# Altium PCB PCB2.PcbDoc
Units mm, origin at the board's own origin, x right, y up, seen from the top; angles counter-clockwise.
Board outline 105.41 x 72.39 mm, 2 copper layers (Top Layer, Bottom Layer), stack 1.571 mm thick; 9 components, 50 nets, 179 pads, 12 vias.
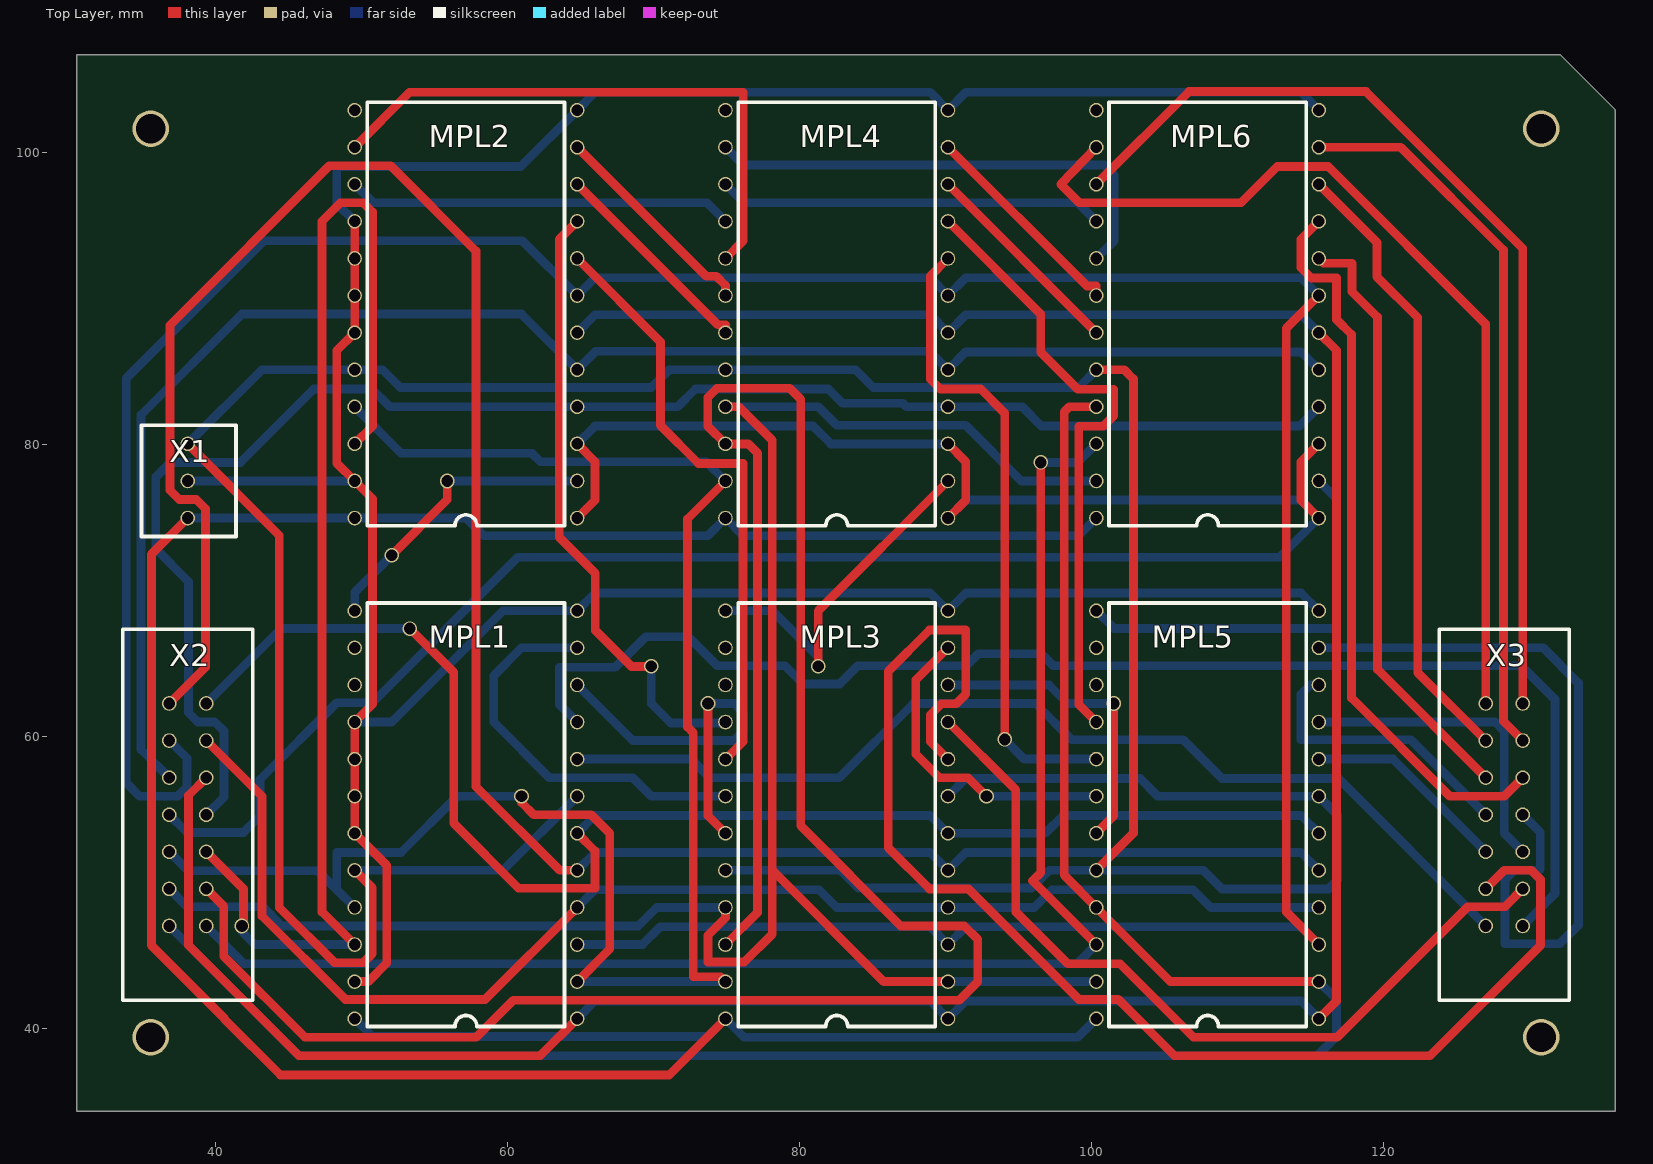
[diagram p0: Top Layer view]
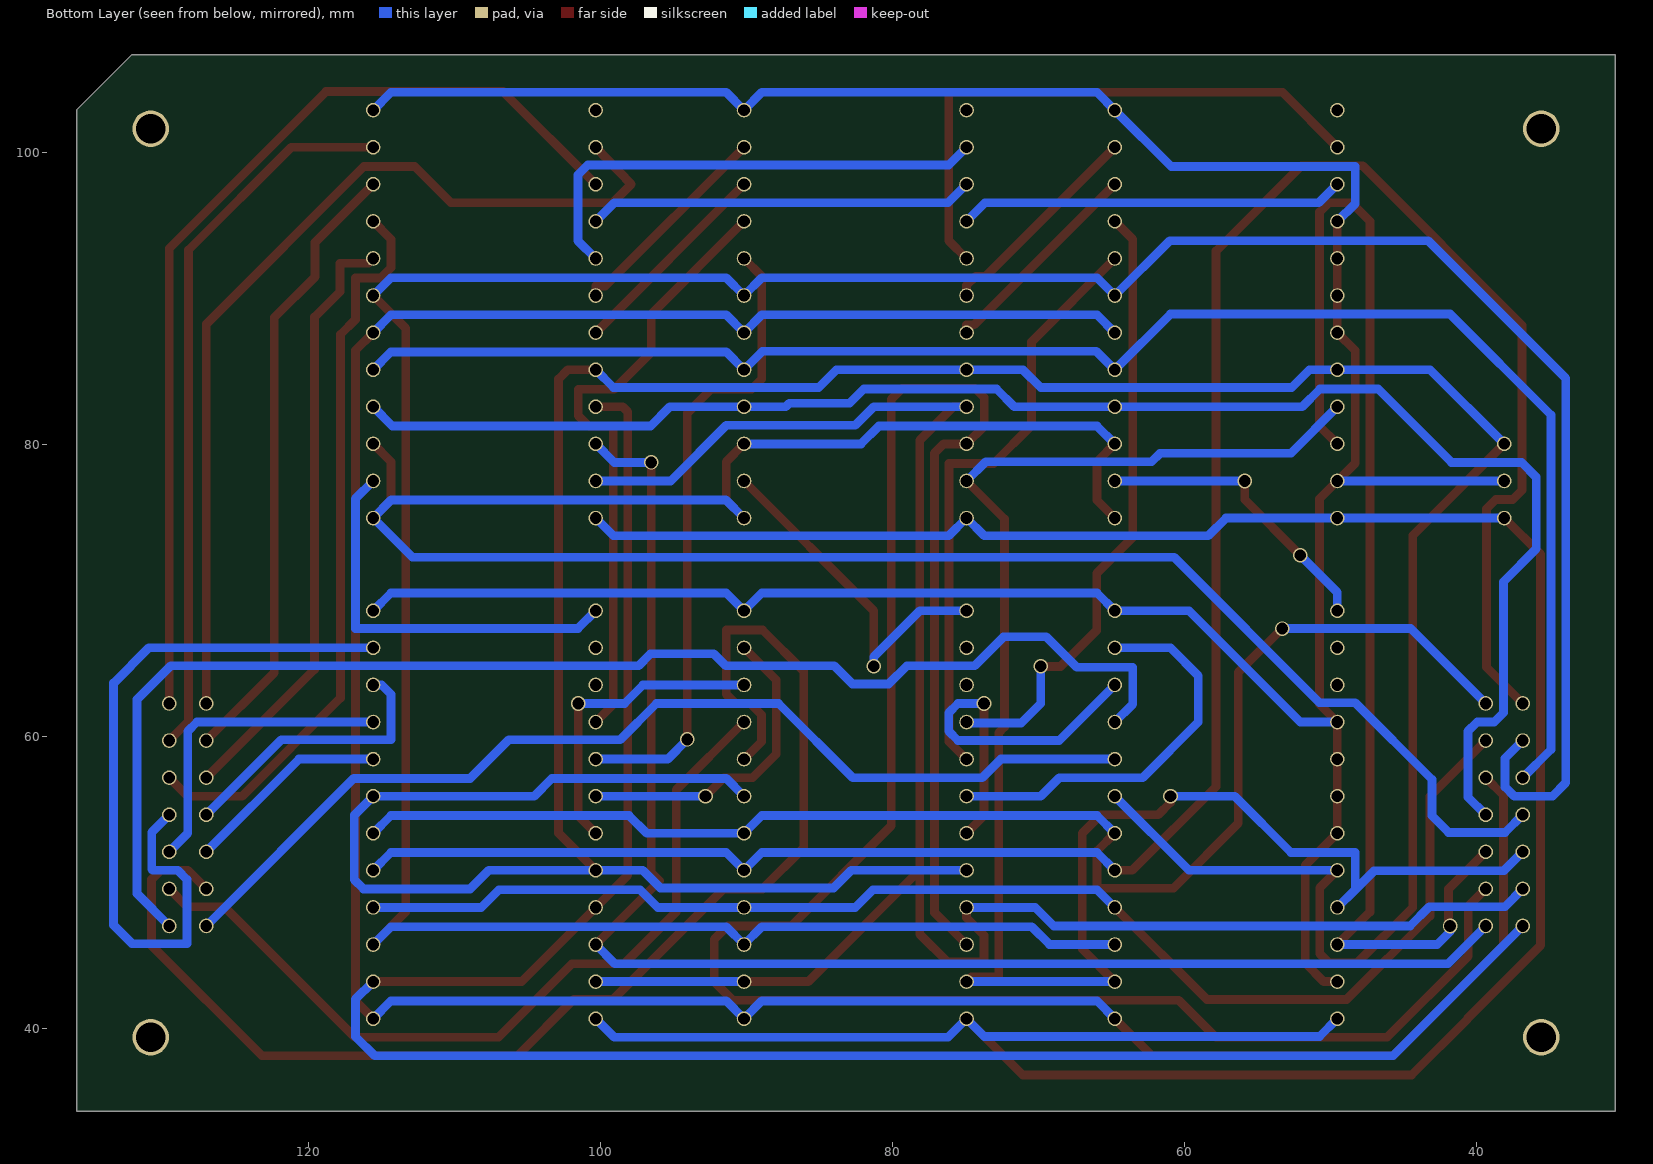
[diagram p1: Bottom Layer view, seen from below]
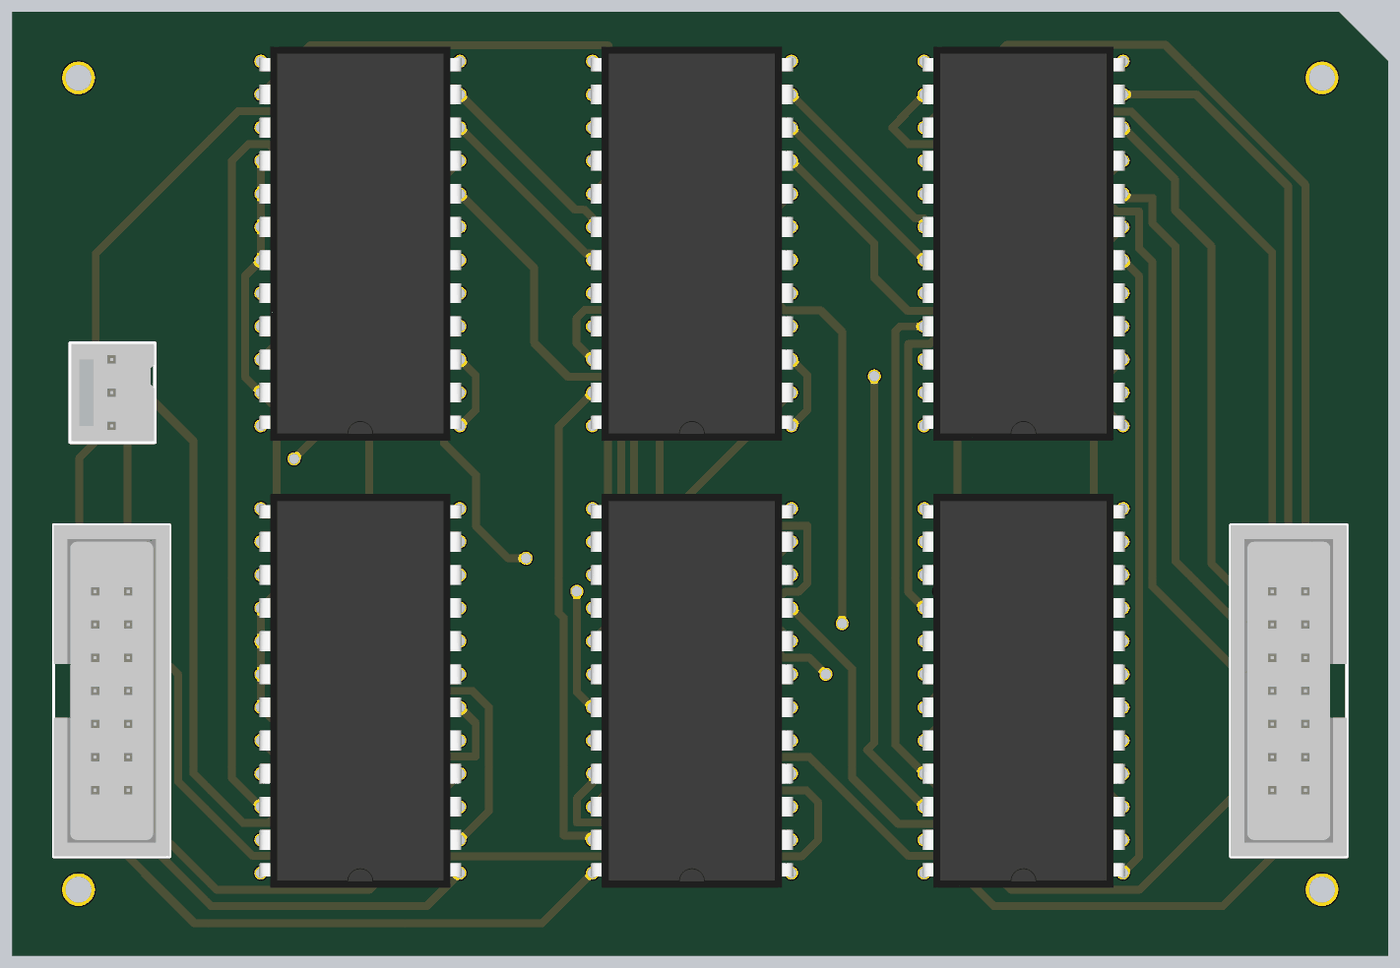
[diagram p2: 3D render of the assembled board from above, using the file's embedded part models]

## Layer stack, top to bottom
Top Solder: solder mask 0.0102, Solder Resist, Dk 3.5
Top Layer: signal copper 0.0356
Dielectric 1: dielectric 1.5, FR-4, Dk 4.8
Bottom Layer: signal copper 0.0356
Bottom Solder: solder mask 0.0102, Solder Resist, Dk 3.5

## Board outline
30.48,34.29 135.89,34.29 135.89,102.87 132.08,106.68 30.48,106.68

## Design rules (kind name [scope] priority, off if disabled: settings)
Clearance [All] p1: gap=0.4 ignorepadtopadclearanceinfootprint=FALSE
PolygonConnect [All] p1: connectstyle=Relief reliefconductorwidth=0.254 reliefentries=4 polygonreliefangle="90 Angle" airgapwidth=0.254
RoutingVias [All] p1: holewidth=0.711 width=1.27 viastyle="Through Hole" minholewidth=0.711 minwidth=1.27 maxholewidth=0.711 maxwidth=1.27
SolderMaskExpansion [All] p1: expansion=0.102
Width [All] p1: maxlimit=0.6 minlimit=0.4 preferedwidth=0.6
30 further rules are at their usual default settings.

## Classes and differential pairs
component class Sheet1: MPL2 MPL3 MPL4 MPL5 MPL6 X1 X3

## Components (designator, comment, footprint, x,y, rotation, side; value= is the part's Value field where it differs from the comment)
MPL1 "Complement multiplier" DIP-24 57.15,54.61 r90 top
MPL2 "Complement multiplier" DIP-24 57.15,88.9 r90 top
MPL3 "Complement multiplier" DIP-24 82.55,54.61 r90 top
MPL4 "Complement multiplier" DIP-24 82.55,88.9 r90 top
MPL5 "Complement multiplier" DIP-24 107.95,54.61 r90 top
MPL6 "Complement multiplier" DIP-24 107.95,88.9 r90 top
X1 "3-pins connector" 3-PINS 38.1,77.47 r90 top
X2 "14-pins connector" 14-PINS 38.1,54.61 r270 top
X3 "14-pins connector" 14-PINS 128.27,54.61 r90 top

## Footprints (in the part's own frame and the unit in brackets; to place one, negate y for a bottom-side part, rotate by r counter-clockwise, add the part's x,y. Pads: shape width x height; smd on the part's side, far side on the other; paste and mask are expansions set on the pad)
3-PINS [mm] "WM14660-ND"
  round 1 hole 0.8: 1(-2.54,0) 2(0,0) 3(2.54,0)
  silkscreen extent -3.81,-3.3 3.81,3.18, body extent -3.73,-3.25 3.73,3.1, height 10.08
14-PINS [mm] "WM17469-ND"
  round 1 hole 0.8: 1(-7.62,1.27) 2(-7.62,-1.27) 3(-5.08,1.27) 4(-5.08,-1.27) 5(-2.54,1.27) 6(-2.54,-1.27) 7(0,1.27) 8(0,-1.27) 9(2.54,1.27) 10(2.54,-1.27) 11(5.08,1.27) 12(5.08,-1.27) 13(7.62,1.27) 14(7.62,-1.27)
  silkscreen extent -12.7,-4.45 12.7,4.45, body extent -12.7,-4.44 12.7,4.44, height 8.95
DIP-24 [mm] "AM25S05"
  round 1 hole 0.8: 1(-13.97,-7.62) 2(-11.43,-7.62) 3(-8.89,-7.62) 4(-6.35,-7.62) 5(-3.81,-7.62) 6(-1.27,-7.62) 7(1.27,-7.62) 8(3.81,-7.62) 9(6.35,-7.62) 10(8.89,-7.62) 11(11.43,-7.62) 12(13.97,-7.62) 13(13.97,7.62) 14(11.43,7.62) 15(8.89,7.62) 16(6.35,7.62) 17(3.81,7.62) 18(1.27,7.62) 19(-1.27,7.62) 20(-3.81,7.62) 21(-6.35,7.62) 22(-8.89,7.62) 23(-11.43,7.62) 24(-13.97,7.62)
  silkscreen extent -14.5,-6.75 14.5,6.75, body extent -15.1,-7.74 15.1,7.75, height 5

## Part data
MPL1 MPL2 MPL3 MPL4 MPL5 MPL6: library part Am25S05
X1: library part WM14660-ND
X2 X3: library part WM17469-ND

## Free pads (board coordinates)
  round 2.5 hole 2 unplated: ""(35.56,39.37) ""(35.56,101.6) ""(130.81,39.37) ""(130.81,101.6)

## Via types
v1: diameter 1, hole 0.8, Top Layer to Bottom Layer, 12 vias

## Nets (pads, with @x,y where several pads share a name; then routed paths per layer and width w, separated by ;. In a path a pad name is that pad's centre, name@x,y a point inside that pad or via, vN(x,y) a via of type N, cw(c..) or ccw(c..) an arc to the next point about the centre after c; other vN are vias at no path point)
NetMPL1_1: MPL1.1 MPL2.6 MPL3.1 MPL4.6 MPL5.1 MPL6.6 X2.5 | length 196.4
  Top Layer w0.6: X2.5 38.151,55.931 38.151,45.669 45.72,38.1 62.23,38.1 MPL1.1 ; MPL5.1 116.789,41.859 116.789,86.411 MPL6.6
  Bottom Layer w0.6: MPL1.1 65.989,41.859 88.951,41.859 MPL3.1 91.389,41.859 114.351,41.859 MPL5.1 ; MPL2.6 65.989,88.849 88.951,88.849 MPL4.6 91.389,88.849 114.351,88.849 MPL6.6
NetMPL1_2: MPL1.2 MPL1.21 MPL2.21 MPL3.23 MPL4.23 X2.10 | length 124.7
  Top Layer w0.6: v1(60.96,55.88) 60.96,55.448 61.798,54.61 65.735,54.61 67.005,53.34 67.005,45.415 MPL1.2 ; MPL3.23 74.59,43.52 72.73,43.52 72.73,60.225 72.328,60.627 72.328,74.868 MPL4.23
  Bottom Layer w0.6: X2.10 38.125,50.775 47.015,50.775 48.311,49.479 ; MPL1.21 48.311,49.479 ; MPL2.21 52.705,79.375 61.671,79.375 62.255,78.791 73.609,78.791 MPL4.23 ; v1(60.96,55.88) 56.566,55.88 52.705,52.019 48.311,52.019 48.311,49.479 ; MPL1.2 MPL3.23
NetMPL1_3: MPL1.3 MPL2.7 MPL3.3 MPL4.7 MPL5.3 MPL6.7 X2.4 | length 224.5
  Top Layer w0.6: MPL5.3 113.335,47.955 113.335,87.935 MPL6.7
  Bottom Layer w0.6: X2.4 38.049,58.471 38.049,56.515 37.414,55.88 34.798,55.88 33.884,56.794 33.884,84.506 43.307,93.929 61.011,93.929 MPL2.7 65.989,91.389 88.951,91.389 MPL4.7 91.389,91.389 114.351,91.389 MPL6.7 ; MPL1.3 69.24,45.72 70.46,46.939 88.951,46.939 MPL3.3 91.389,46.939 114.351,46.939 MPL5.3
NetMPL1_4: MPL1.4 MPL3.4 MPL5.4 X2.3 | length 93
  Top Layer w0.6: X2.3 43.18,55.88 43.18,47.676 48.895,41.961 58.471,41.961 MPL1.4
  Bottom Layer w0.6: MPL1.4 65.989,49.479 81.331,49.479 82.55,48.26 MPL3.4 96.078,48.26 97.297,49.479 106.95,49.479 108.169,48.26 MPL5.4
NetMPL1_5: MPL1.5 MPL3.5 MPL5.5 X2.2 | length 155.3
  Top Layer w0.6: X2.2 39.319,64.719 39.319,75.565 38.684,76.2 37.516,76.2 36.881,76.835 36.881,88.138 47.803,99.06 51.994,99.06 57.836,93.218 57.836,56.54 63.576,50.8 MPL1.5
  Bottom Layer w0.6: MPL1.5 65.989,52.019 88.951,52.019 MPL3.5 91.389,52.019 114.351,52.019 MPL5.5
NetMPL1_6: MPL1.6 MPL3.6 MPL5.6 X2.1 | length 99.2
  Top Layer w0.6: v1(53.315,67.361) 56.312,64.364 56.312,54.026 60.757,49.581 65.989,49.581 65.989,52.121 MPL1.6
  Bottom Layer w0.6: X2.1 44.501,67.361 v1(53.315,67.361) ; MPL1.6 65.989,54.559 88.951,54.559 MPL3.6 96.834,53.34 98.053,54.559 114.351,54.559 MPL5.6
NetMPL1_7: MPL1.7 MPL1.20 MPL2.20 MPL3.7 MPL3.20 MPL4.20 MPL5.7 MPL5.20 MPL6.20 X1.3 | length 246.3
  Top Layer w0.6: X1.3 44.374,73.736 44.374,48.26 48.158,44.475 50.114,44.475 50.73,45.091 50.73,49.6 MPL1.20 ; MPL5.20 102.871,53.341 102.871,84.455 102.236,85.09 MPL6.20
  Bottom Layer w0.6: X1.3 43.18,85.09 MPL2.20 51.436,85.09 52.655,83.871 69.85,83.871 71.069,85.09 MPL4.20 83.84,85.09 85.059,83.871 99.111,83.871 MPL6.20 ; MPL1.20 59.69,50.8 MPL1.7 ; MPL3.20 82.829,50.8 84.029,49.6 95.904,49.6 97.104,50.8 MPL5.20 107.645,50.8 108.915,49.53 116.23,49.53 116.865,50.165 116.865,54.585 MPL5.7 104.546,55.88 103.327,57.099 91.389,57.099 MPL3.7
NetMPL1_8: MPL1.8 X3.1 | length 71.2
  Bottom Layer w0.6: MPL1.8 72.593,58.42 73.863,57.15 82.728,57.15 87.808,62.23 96.164,62.23 98.654,59.741 106.274,59.741 108.915,57.099 116.891,57.099 X3.1
NetMPL1_9: MPL1.9 X3.2 | length 93.2
  Bottom Layer w0.6: MPL1.9 63.551,62.179 63.551,64.719 67.386,64.719 69.469,66.802 72.39,66.802 74.371,64.821 79.005,64.821 80.256,63.57 82.75,63.57 84.001,64.821 91.415,64.821 92.236,65.641 96.571,65.641 97.391,64.821 129.438,64.821 131.74,62.519 131.74,49.19 X3.2
NetMPL1_10: MPL1.10 MPL3.19 | length 26.6
  Top Layer w0.6: v1(73.73,62.23) 73.73,54.54 MPL3.19
  Bottom Layer w0.6: MPL1.10 68.58,59.69 75.514,59.69 76.149,60.325 76.149,61.595 75.514,62.23 v1(73.73,62.23)
NetMPL1_11: MPL1.11 MPL3.18 | length 27.7
  Bottom Layer w0.6: MPL1.11 60.96,66.04 59.055,64.135 59.055,60.96 62.865,57.15 68.58,57.15 69.85,55.88 MPL3.18
NetMPL1_12: MPL1.12 MPL1.16 MPL1.17 MPL1.18 MPL1.19 MPL1.23 MPL2.12 MPL2.16 MPL2.17 MPL2.18 MPL2.19 MPL2.23 MPL3.12 MPL4.12 MPL5.12 MPL6.12 X1.2 | length 214.2
  Top Layer w0.6: MPL1.23 50.46,43.18 51.73,44.45 51.73,51.14 MPL1.19 MPL1.18 MPL1.17 MPL1.16 50.749,62.179 50.749,76.251 MPL2.23 48.311,78.689 48.311,86.411 MPL2.19 MPL2.18 MPL2.17 MPL2.16
  Bottom Layer w0.6: X1.2 MPL2.23 ; MPL1.16 52.07,60.96 59.69,68.58 MPL1.12 65.989,69.799 88.951,69.799 MPL3.12 91.389,69.799 114.351,69.799 MPL5.12 ; MPL2.16 48.311,96.469 48.311,99.009 60.909,99.009 MPL2.12 65.989,104.089 88.951,104.089 MPL4.12 91.389,104.089 114.351,104.089 MPL6.12
NetMPL1_13: MPL1.13 MPL2.2 | length 20.4
  Top Layer w0.6: v1(52.07,72.39) 55.88,76.2 v1(55.88,77.47)
  Bottom Layer w0.6: MPL1.13 49.53,69.85 v1(52.07,72.39) ; v1(55.88,77.47) MPL2.2
NetMPL1_22: MPL1.22 MPL2.22 X2.9 | length 85.9
  Top Layer w0.6: X2.9 41.91,49.53 41.91,47.187 41.713,46.99 v1(41.811,46.99) ; MPL1.22 47.295,47.955 47.295,95.25 48.565,96.52 50.114,96.52 50.749,95.885 50.749,81.229 MPL2.22
  Bottom Layer w0.6: v1(41.811,46.99) 41.811,46.606 42.697,45.72 MPL1.22
NetMPL1_24: MPL1.24 MPL2.24 MPL3.24 MPL4.24 MPL5.24 MPL6.24 X1.1 | length 192
  Top Layer w0.6: X1.1 35.611,72.441 35.611,45.669 40.64,40.64 40.64,40.589 44.45,36.779 71.069,36.779 MPL3.24
  Bottom Layer w0.6: X1.1 MPL2.24 57.15,74.93 58.369,73.711 73.711,73.711 MPL4.24 76.149,73.711 99.111,73.711 MPL6.24 ; MPL1.24 50.749,39.421 73.711,39.421 MPL3.24 76.2,39.37 99.06,39.37 MPL5.24
NetMPL2_1: MPL2.1 MPL2.3 MPL4.1 MPL4.3 MPL6.1 MPL6.3 X2.8 | length 160.7
  Top Layer w0.6: MPL2.1 65.989,76.149 65.989,78.791 MPL2.3 ; MPL4.1 91.389,76.149 91.389,78.791 MPL4.3 ; MPL6.1 114.351,76.149 114.351,78.791 MPL6.3
  Bottom Layer w0.6: X2.8 38.049,53.391 41.91,53.391 43.053,54.534 43.053,57.023 48.311,62.281 50.749,62.281 60.706,72.238 112.878,72.238 MPL6.1 114.325,76.175 91.415,76.175 MPL4.1 ; MPL2.3 65.989,81.229 80.94,81.229 82.16,80.01 MPL4.3
NetMPL2_4: MPL2.4 MPL4.4 MPL6.4 X2.7 | length 111
  Bottom Layer w0.6: X2.7 40.589,55.829 40.589,60.325 39.954,60.96 38.786,60.96 38.151,61.595 38.151,70.571 35.9,72.822 35.9,77.734 36.906,78.74 41.707,78.74 46.736,83.769 50.724,83.769 51.943,82.55 MPL2.4 71.653,82.55 72.873,83.769 81.967,83.769 82.94,82.796 87.063,82.796 87.309,82.55 MPL4.4 95.25,82.55 96.571,81.229 114.249,81.229 MPL6.4
NetMPL2_5: MPL2.5 MPL4.5 MPL6.5 X2.6 | length 112.8
  Bottom Layer w0.6: X2.6 34.9,59.08 34.9,81.991 41.808,88.9 60.96,88.9 MPL2.5 66.04,86.36 88.9,86.36 MPL4.5 91.389,86.309 114.351,86.309 MPL6.5
NetMPL2_8: MPL2.8 MPL3.17 | length 41.3
  Top Layer w0.6: MPL2.8 70.473,87.007 70.473,81.28 73.083,78.67 76.13,78.67 76.13,59.62 MPL3.17
NetMPL2_9: MPL2.9 MPL3.16 | length 42.6
  Top Layer w0.6: MPL2.9 63.551,94.031 63.551,73.609 66.015,71.145 66.015,67.234 68.478,64.77 v1(69.85,64.77)
  Bottom Layer w0.6: v1(69.85,64.77) 69.85,62.23 71.185,60.895 74.73,60.895 74.73,60.96 MPL3.16
NetMPL2_10: MPL2.10 MPL4.19 | length 14.7
  Top Layer w0.6: MPL2.10 74.397,88.163 74.93,88.163 MPL4.19
NetMPL2_11: MPL2.11 MPL4.18 | length 14.8
  Top Layer w0.6: MPL2.11 73.609,91.491 74.295,91.491 74.93,90.856 MPL4.18
NetMPL2_14: MPL2.14 MPL4.17 | length 40.1
  Top Layer w0.6: MPL2.14 53.289,104.089 76.149,104.089 76.149,93.929 MPL4.17
NetMPL2_15: MPL2.15 MPL4.16 | length 26.5
  Bottom Layer w0.6: MPL2.15 50.8,96.52 73.66,96.52 MPL4.16
NetMPL3_2: MPL3.2 MPL3.21 MPL4.21 MPL5.23 MPL6.23 X2.12 | length 140
  Top Layer w0.6: MPL3.21 74.93,47.555 73.73,46.355 73.73,44.52 76.219,44.52 78.13,46.431 78.13,50.825 ; MPL4.21 75.844,82.55 78.13,80.264 78.13,50.825 ; MPL3.2 85.776,43.18 78.13,50.825
  Bottom Layer w0.6: X2.12 38.049,48.311 43.231,48.311 44.552,46.99 68.961,46.99 70.231,48.26 MPL3.21 ; MPL4.21 81.28,82.55 82.55,81.28 91.378,81.28 95.188,77.47 MPL6.23 ; MPL3.2 MPL5.23
NetMPL3_8: MPL3.8 X3.3 | length 92.3
  Top Layer w0.6: MPL3.8 88.97,59.62 88.97,61.462 89.713,62.205 90.729,62.205 91.389,62.865 91.389,67.259 88.9,67.259 86.081,64.44 86.081,52.349 88.9,49.53 91.567,49.53 99.136,41.961 101.829,41.961 105.689,38.1 123.19,38.1 130.759,45.669 130.759,50.165 130.124,50.8 128.27,50.8 X3.3
NetMPL3_9: MPL3.9 X3.4 | length 57.4
  Top Layer w0.6: MPL3.9 94.818,56.312 94.818,47.955 98.374,44.399 101.956,44.399 106.985,39.37 116.84,39.37 125.781,48.311 128.321,48.311 X3.4
NetMPL3_10: MPL3.10 MPL5.19 | length 21.3
  Top Layer w0.6: MPL5.19 101.53,54.54 v1(101.53,62.23)
  Bottom Layer w0.6: MPL3.10 97.09,63.5 98.36,62.23 v1(101.53,62.23)
NetMPL3_11: MPL3.11 MPL5.18 | length 21.7
  Top Layer w0.6: MPL3.11 87.97,63.84 87.97,58.766 89.586,57.15 91.542,57.15 v1(92.812,55.88)
  Bottom Layer w0.6: v1(92.812,55.88) MPL5.18
NetMPL3_13: MPL3.13 MPL4.2 | length 24.7
  Top Layer w0.6: v1(81.28,64.77) 81.28,68.58 MPL4.2
  Bottom Layer w0.6: MPL3.13 78.13,68.58 81.28,65.43 v1(81.28,64.77)
NetMPL3_22: MPL3.22 MPL4.22 X2.11 | length 155.7
  Top Layer w0.6: X2.11 40.57,48.33 40.57,44.926 46.126,39.37 57.861,39.37 60.401,41.91 90.932,41.91 92.202,43.18 92.202,46.076 91.288,46.99 86.944,46.99 80.08,53.854 80.08,65.267 80.086,65.273 80.086,83.058 79.324,83.82 74.346,83.82 73.711,83.185 73.711,81.229 MPL4.22 76.495,80.01 77.13,79.375 77.13,47.92 MPL3.22
NetMPL4_8: MPL4.8 MPL5.17 | length 44
  Top Layer w0.6: MPL4.8 88.951,91.491 88.951,84.455 89.637,83.769 92.405,83.769 94.056,82.118 v1(94.056,59.766)
  Bottom Layer w0.6: v1(94.056,59.766) 95.402,58.42 MPL5.17
NetMPL4_9: MPL4.9 MPL5.16 | length 42.9
  Top Layer w0.6: MPL4.9 96.52,88.9 96.52,86.29 99.06,83.75 101.53,83.75 101.53,81.947 100.793,81.21 99.13,81.21 99.13,62.16 MPL5.16
NetMPL4_10: MPL4.10 MPL6.19 | length 14.4
  Top Layer w0.6: MPL4.10 MPL6.19
NetMPL4_11: MPL4.11 MPL6.18 | length 14.8
  Top Layer w0.6: MPL4.11 99.67,90.83 100.33,90.83 MPL6.18
NetMPL4_14: MPL4.14 MPL6.17 | length 33.6
  Bottom Layer w0.6: MPL4.14 76.149,99.111 100.863,99.111 101.549,98.425 101.549,93.929 MPL6.17
NetMPL4_15: MPL4.15 MPL6.16 | length 26.5
  Bottom Layer w0.6: MPL4.15 76.2,96.52 99.06,96.52 MPL6.16
NetMPL5_2: MPL5.2 MPL5.21 MPL6.21 X2.14 | length 143
  Top Layer w0.6: MPL6.21 98.47,82.55 98.13,82.21 98.13,50.46 MPL5.21 105.41,43.18 MPL5.2
  Bottom Layer w0.6: X2.14 45.72,38.1 115.468,38.1 116.789,39.421 116.789,41.961 MPL5.2
NetMPL5_8: MPL5.8 X3.5 | length 14.1
  Bottom Layer w0.6: MPL5.8 120.65,58.42 X3.5
NetMPL5_9: MPL5.9 X3.6 | length 21.7
  Bottom Layer w0.6: MPL5.9 127.635,60.96 128.27,60.325 128.27,53.34 X3.6
NetMPL5_10: MPL5.10 X3.7 | length 19.4
  Bottom Layer w0.6: MPL5.10 114.986,63.5 114.351,62.865 114.351,59.741 121.869,59.741 X3.7
NetMPL5_11: MPL5.11 X3.8 | length 52.3
  Bottom Layer w0.6: MPL5.11 130.937,66.04 133.35,63.627 133.35,47.041 132.08,45.771 128.321,45.771 128.321,50.165 128.956,50.8 130.664,50.8 130.74,50.876 130.74,53.41 X3.8
NetMPL5_13: MPL5.13 MPL6.2 | length 27.6
  Bottom Layer w0.6: MPL5.13 101.549,67.361 116.789,67.361 116.789,76.251 MPL6.2
NetMPL5_22: MPL5.22 MPL6.22 X2.13 | length 102
  Top Layer w0.6: v1(96.52,78.74) 96.52,50.648 95.961,50.089 MPL5.22
  Bottom Layer w0.6: X2.13 41.95,44.41 99.02,44.41 MPL5.22 ; v1(96.52,78.74) 99.06,78.74 MPL6.22
NetMPL6_8: MPL6.8 X3.9 | length 41.4
  Top Layer w0.6: MPL6.8 115.897,92.383 117.835,92.383 117.835,90.445 119.585,88.695 119.585,64.565 X3.9
NetMPL6_9: MPL6.9 X3.10 | length 50.6
  Top Layer w0.6: MPL6.9 114.351,94.031 114.351,92.075 115.056,91.37 116.789,91.37 116.789,88.519 117.805,87.503 117.805,62.611 124.536,55.88 128.27,55.88 X3.10
NetMPL6_10: MPL6.10 X3.11 | length 42.8
  Top Layer w0.6: MPL6.10 119.548,93.812 119.548,91.469 122.352,88.665 122.352,64.338 X3.11
NetMPL6_11: MPL6.11 X3.12 | length 49.7
  Top Layer w0.6: MPL6.11 121.183,100.33 128.219,93.294 128.219,61.011 X3.12
NetMPL6_14: MPL6.14 X3.13 | length 64.6
  Top Layer w0.6: MPL6.14 97.892,97.79 99.162,96.52 110.236,96.52 112.725,99.009 116.205,99.009 127,88.214 X3.13
NetMPL6_15: MPL6.15 X3.14 | length 67.5
  Top Layer w0.6: MPL6.15 106.68,104.14 118.796,104.14 129.54,93.396 X3.14
pads on no net: MPL1.14 MPL1.15 MPL2.13 MPL3.14 MPL3.15 MPL4.13 MPL5.14 MPL5.15 MPL6.13

## Silkscreen, mask and mechanical layers (free items; w line width, h text height)
Mechanical 1:
  the board outline again, w0.254